# Altium PCB FEU31_Part1.PcbDoc
Units mm, origin at the board's own origin, x right, y up, seen from the top; angles counter-clockwise.
Board outline 22 x 22 mm, 2 copper layers (Top Layer, Bottom Layer), stack 1.021 mm thick; 1 components, 10 nets, 20 pads, 0 vias.
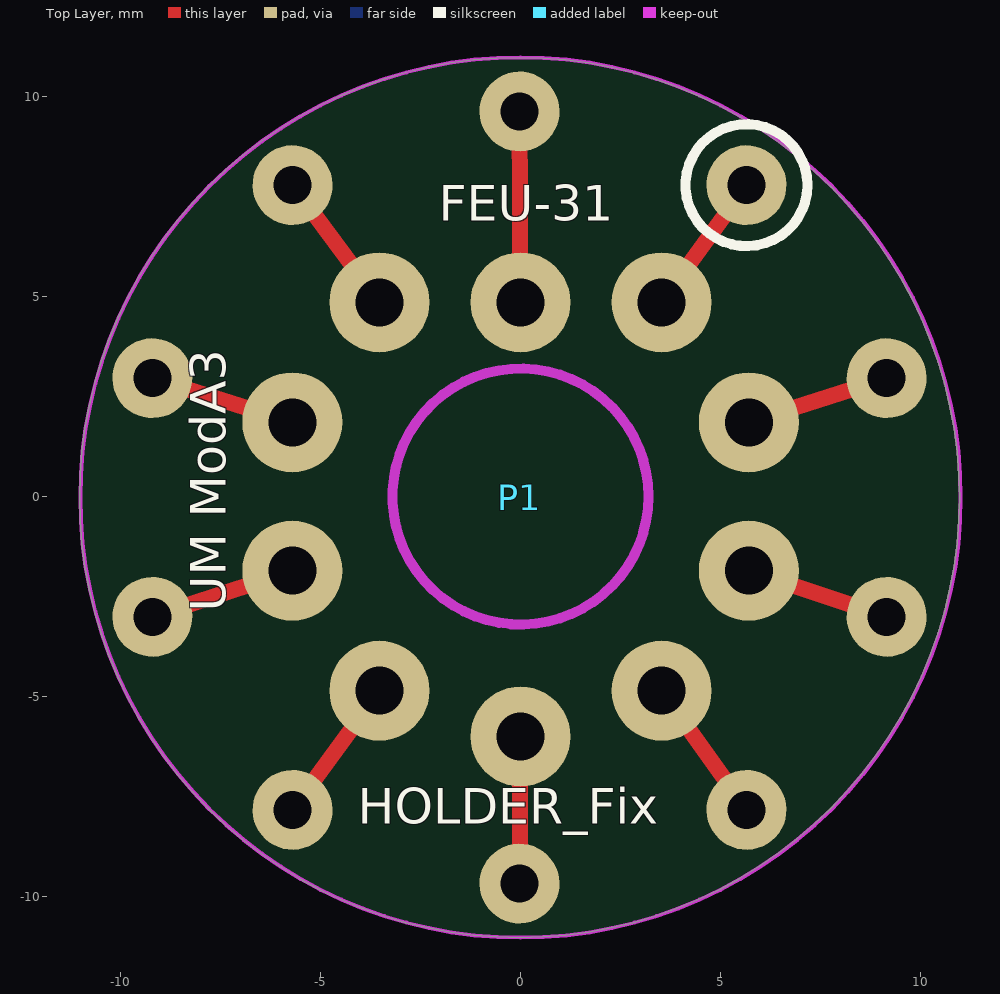
[diagram p0: Top Layer view]
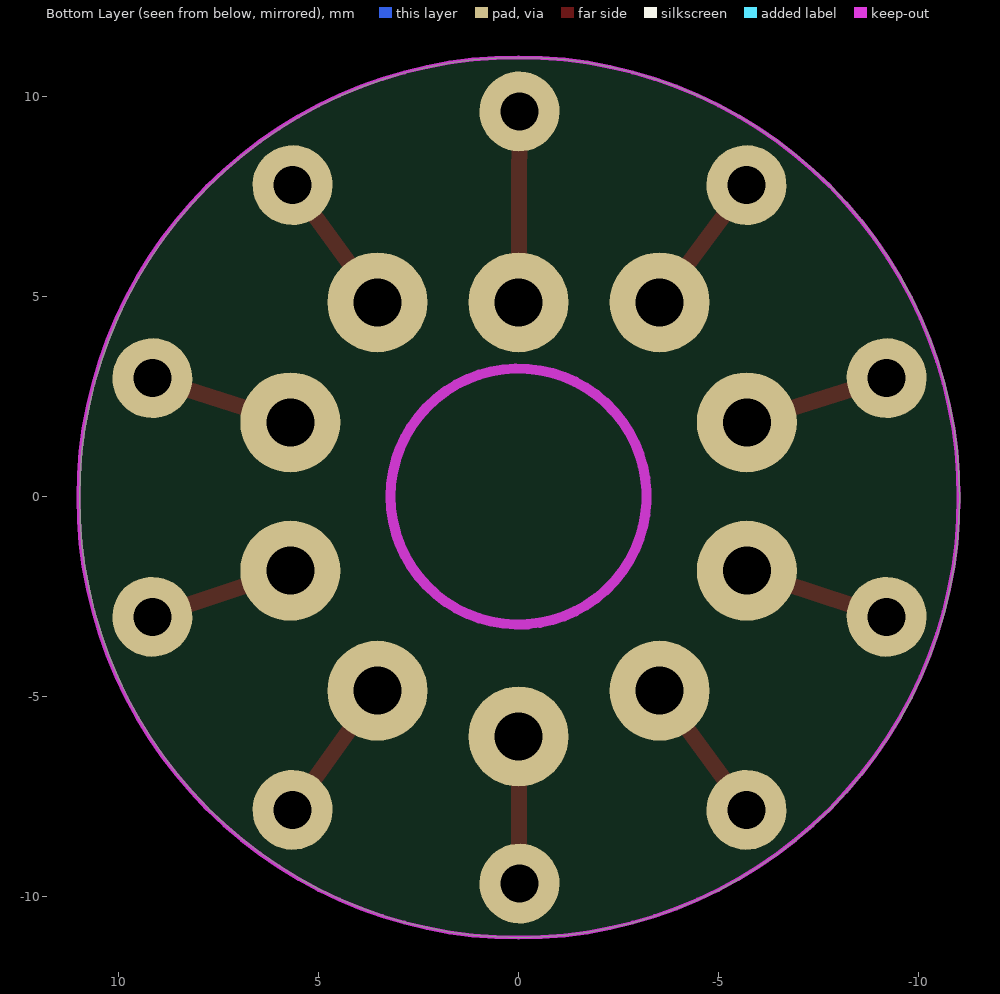
[diagram p1: Bottom Layer view, seen from below]

## Layer stack, top to bottom
Top Solder: solder mask 0.0102, Solder Resist, Dk 3.5
Top Layer: signal copper 0.0356
Dielectric1: dielectric 0.95, FR-4, Dk 4.8
Bottom Layer: signal copper 0.0356
Bottom Solder: solder mask 0.0102, Solder Resist, Dk 3.5

## Board outline
-11.025,-0.025 ccw(c-0.025,-0.025) -0.025,-11.025 ccw(c-0.025,-0.025) 10.975,-0.025 ccw(c-0.025,-0.025) -0.025,10.975 ccw(c-0.025,-0.025)

## Design rules (kind name [scope] priority, off if disabled: settings)
Clearance [All] p1: gap=0.25
ComponentClearance [All] p1: gap=0.1 collisioncheckmode=3 verticalgap=0.254 showdistances=TRUE
HoleSize [All] p1: absolutevalues=TRUE maxlimit=2.54 minlimit=0.3 maxpercent=80.000 minpercent=20.000
HoleToHoleClearance [All] p1: gap=0.152 allowstackedmicrovias=TRUE
MinimumAnnularRing [All] p1: minimumring=0.35
MinimumSolderMaskSliver [All] p1: minsoldermaskwidth=0.152
PlaneClearance [All] p1: clearance=2
PlaneConnect [All] p1: planeconnectstyle=Relief reliefexpansion=0.457 reliefentries=4 reliefconductorwidth=0.3 reliefairgap=0.457
PolygonConnect PolygonConnect_via [IsVia] p1: connectstyle=Direct reliefconductorwidth=0.254 reliefentries=4 polygonreliefangle="90 Angle" airgapwidth=0.254
PolygonConnect [All] p2: connectstyle=Relief reliefconductorwidth=0.254 reliefentries=4 polygonreliefangle="90 Angle" airgapwidth=0.254
RoutingVias [All] p1: holewidth=0.3 width=0.62 viastyle="Through Hole" minholewidth=0.3 minwidth=0.62 maxholewidth=6 maxwidth=4
SilkToSilkClearance [All] p1: silktosilkclearance=0.152
SilkToSolderMaskClearance SilkscreenOverComponentPads [IsPad] p1: minsilkscreentomaskgap=0.1 clearancetoexposedcopper=TRUE
SolderMaskExpansion [All] p1: expansion=0.1
Width [All] p1: maxlimit=2.254 minlimit=0.4 preferedwidth=0.4
22 further rules are at their usual default settings.

## Components (designator, comment, footprint, x,y, rotation, side; value= is the part's Value field where it differs from the comment)
P1 "Header 5X2" ФЭУ-31 -0.025,-0.025 r54 top locked

## Footprints (in the part's own frame and the unit in brackets; to place one, negate y for a bottom-side part, rotate by r counter-clockwise, add the part's x,y. Pads: shape width x height; smd on the part's side, far side on the other; paste and mask are expansions set on the pad)
ФЭУ-31 [mm]
  round 2 hole 0.95: 1(9.652,0) 2(7.809,-5.673) 3(2.983,-9.18) 4(-2.983,-9.18) 5(-7.809,-5.673) 6(-9.652,0) 7(-7.809,5.673) 8(-2.983,9.18) 9(2.983,9.18) 10(7.809,5.673)
  silkscreen extent 8.13,-1.52 11.18,1.52

## Part data
P1: "Header, 5-Pin, Dual row"

## Free pads (board coordinates)
  round 2.5 hole 1.2: 1(3.527,4.854) 2(5.706,1.854) 3(5.706,-1.854) 4(3.527,-4.854) 5(0,-6) 6(-3.527,-4.854) 7(-5.706,-1.854) 8(-5.706,1.854) 9(-3.527,4.854) 10(0,4.854)

## Nets (pads, with @x,y where several pads share a name; then routed paths per layer and width w, separated by ;. In a path a pad name is that pad's centre, name@x,y a point inside that pad or via, vN(x,y) a via of type N, cw(c..) or ccw(c..) an arc to the next point about the centre after c; other vN are vias at no path point)
ANODE: P1.5 pad.5 | length 3.7
  Top Layer w0.4: P1.5 pad.5
DINODE1: P1.9 pad.9 | length 2.8
  Top Layer w0.4: P1.9@-5.216,7.134 pad.9
DINODE2: P1.1 pad.1 | length 3.6
  Top Layer w0.4: pad.1 P1.1
DINODE3: P1.8 pad.8 | length 3.7
  Top Layer w0.4: P1.8 pad.8
DINODE4: P1.2 pad.2 | length 4
  Top Layer w0.4: pad.2@5.956,2.104 pad.2 P1.2
DINODE5: P1.7 pad.7 | length 3.7
  Top Layer w0.4: P1.7 pad.7 pad.7@-5.731,-1.879
DINODE6: P1.3 pad.3 | length 4
  Top Layer w0.4: pad.3@6.119,-1.854 pad.3 P1.3
DINODE7: P1.6 pad.6 | length 4.4
  Top Layer w0.4: P1.6 pad.6 pad.6@-3.527,-5.596
DINODE8: P1.4 pad.4 | length 3.7
  Top Layer w0.4: pad.4 P1.4
FOTOKAT: P1.10 pad.10 | length 4.8
  Top Layer w0.4: P1.10 pad.10

## Keep-outs
Keep-Out Layer:
  circle w0.1: c0,-0.025 r11.006
  circle w0.254: c0,0 r3.2

## Silkscreen, mask and mechanical layers (free items; w line width, h text height)
Top Overlay:
  text "FEU-31" at -2.05,6.6 h1.52
  text "UM ModA3" at -7.075,-2.875 h1.52 r90
  text "HOLDER_Fix" at -4.075,-8.475 h1.52